# EAGLE board calculator3 (EAGLE 9.6.2)
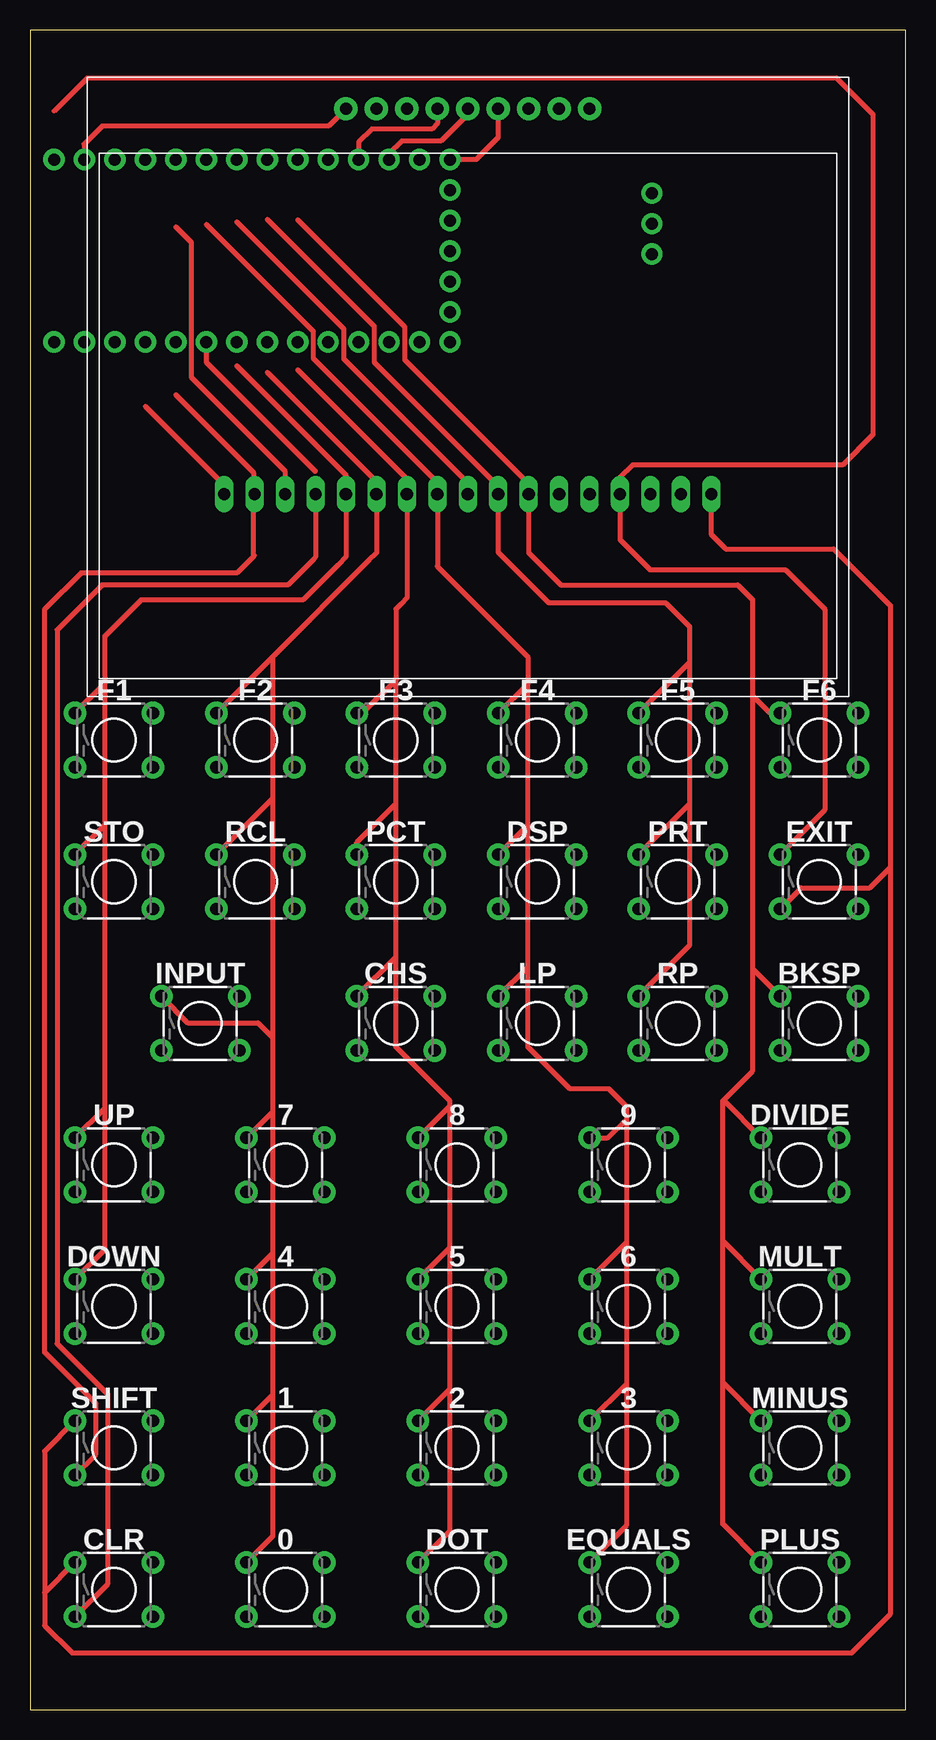
[diagram p0: board, top side]
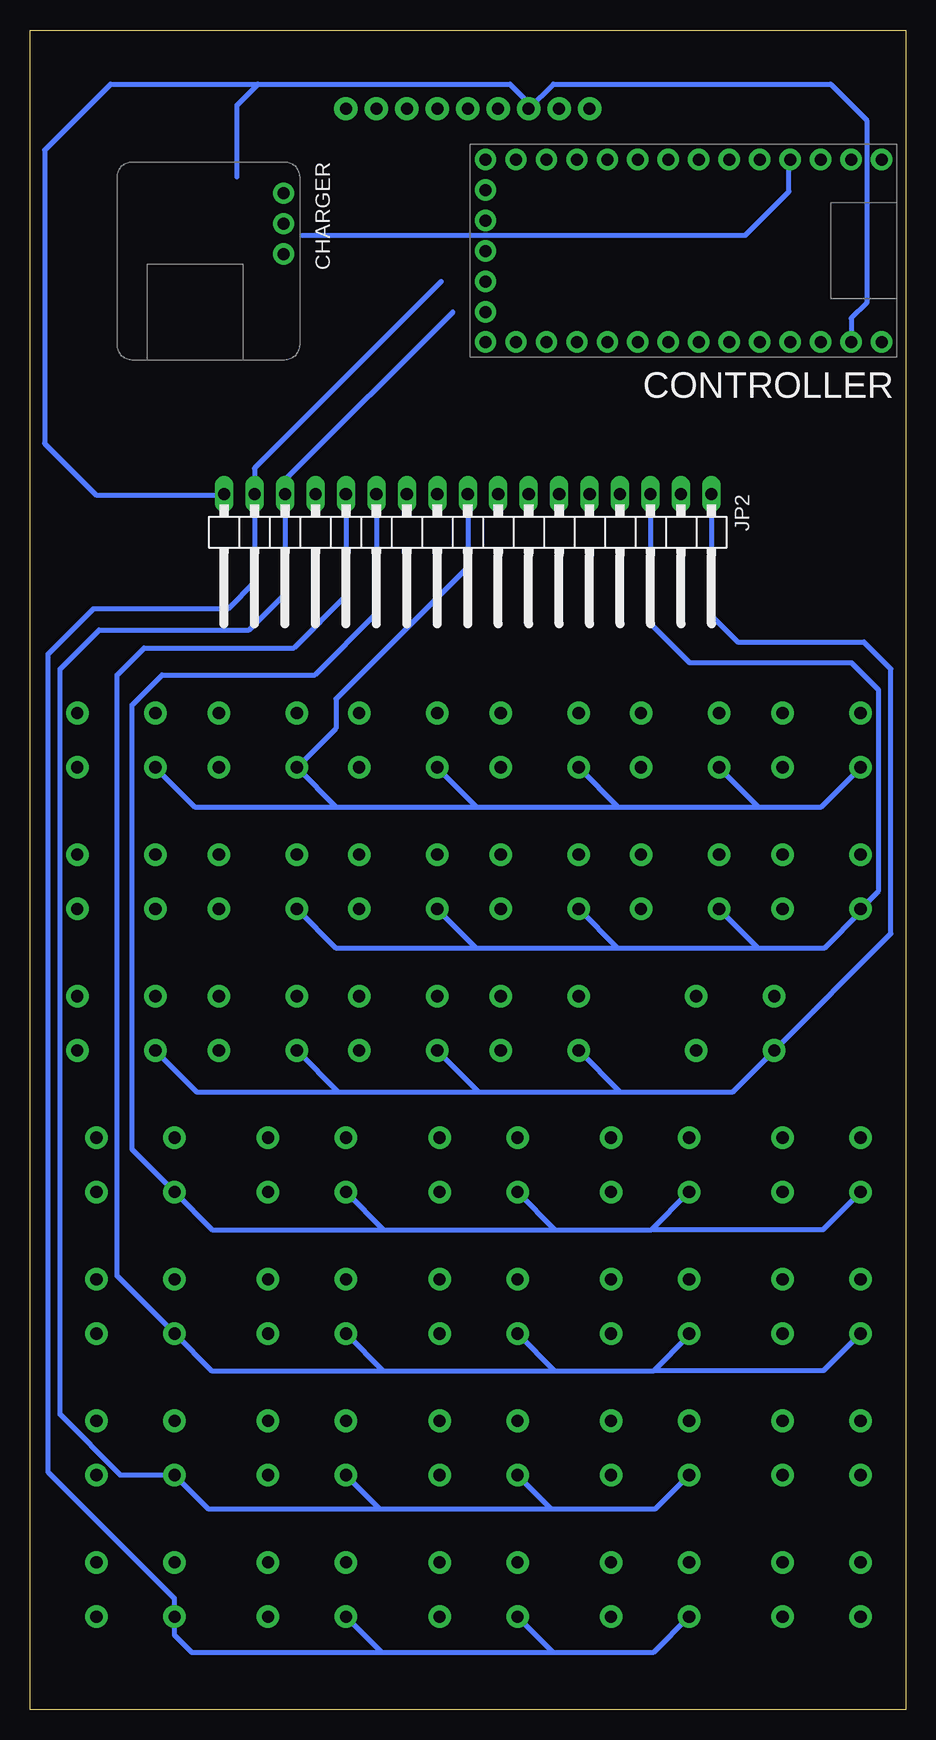
[diagram p1: board, bottom side, seen from below]

Size 73 x 140 mm. Coordinates in mm from the lower left corner, seen from the top.
Outline: 0,0 73,0 73,140 0,140 0,0
Copper layers (1*16): Top 0.035mm / dielectric 1.5mm / Bottom 0.035mm
Design rules "default": minimum track width 6mil, minimum drill 0.35mm, track to track 6mil, track to pad 6mil, pad to pad 6mil, via to via 6mil, smd to smd 6mil, copper to edge 40mil, drill to drill 6mil, minimum pad ring 10mil, minimum via ring 8mil, stop-mask expansion 4mil, vias tented up to drill 0mil, thermal gap 10mil

## Footprints (pad centres in the part's own frame; a part is rotated, then mirrored left to right if it is on the bottom)
BUTTON = drill 1.016 pad 1.88: 1 -3.251,2.261; 2 3.251,2.261; 3 -3.251,-2.261; 4 3.251,-2.261
LIPO_BACKPACK = drill 1 pad 1.778: 5V 7.68,13.9; BAT 2.6,13.9; GND 5.14,13.9
ITSYM4 = drill 1 pad 1.778: 0 34.27,16.5; 1 31.73,16.5; 2 34.27,1.3; 3 34.27,11.46; 3V3 3.79,1.3; 4 34.27,14; 5 24.11,16.5; 7 21.57,16.5; 9 19.03,16.5; 10 16.49,16.5; 11 13.95,16.5; 12 11.41,16.5; 13 8.87,16.5; A0 11.41,1.3; A1 13.95,1.3; A2 16.49,1.3; A3 19.03,1.3; A4 21.57,1.3; A5 24.11,1.3; AREF 6.33,1.3; BAT 1.25,16.5; DEBUG1 34.27,8.92; DEBUG2 34.27,6.38; EN 34.27,3.84; GND 3.79,16.5; MISO 31.73,1.3; MOSI 29.19,1.3; RST 1.25,1.3; SCK 26.65,1.3; SCL 26.65,16.5; SDA 29.19,16.5; USB 6.33,16.5; VHI 8.87,1.3
1X17/90 = drill 1.016 long: 1 -20.32,-3.81; 2 -17.78,-3.81; 3 -15.24,-3.81; 4 -12.7,-3.81; 5 -10.16,-3.81; 6 -7.62,-3.81; 7 -5.08,-3.81; 8 -2.54,-3.81; 9 0,-3.81; 10 2.54,-3.81; 11 5.08,-3.81; 12 7.62,-3.81; 13 10.16,-3.81; 14 12.7,-3.81; 15 15.24,-3.81; 16 17.78,-3.81; 17 20.32,-3.81
SHARPMEM = drill 1 pad 1.93: 3V3 -7.62,23.2; CLK -2.54,23.2; CS 2.54,23.2; DI 0,23.2; DISP 7.62,23.2; EIN 10.16,23.2; EMD 5.08,23.2; GND -5.08,23.2; VIN -10.16,23.2

## Placement (x,y rotation side)
0  BUTTON  [BUTTON]  21.3,10 0 top
1  BUTTON  [BUTTON]  21.3,21.8 0 top
2  BUTTON  [BUTTON]  35.6,21.8 0 top
3  BUTTON  [BUTTON]  49.9,21.8 0 top
4  BUTTON  [BUTTON]  21.3,33.6 0 top
5  BUTTON  [BUTTON]  35.6,33.6 0 top
6  BUTTON  [BUTTON]  49.9,33.6 0 top
7  BUTTON  [BUTTON]  21.3,45.4 0 top
8  BUTTON  [BUTTON]  35.6,45.4 0 top
9  BUTTON  [BUTTON]  49.9,45.4 0 top
BKSP  BUTTON  [BUTTON]  65.8,57.2 0 top
CHARGER  LIPO_BACKPACK  [LIPO_BACKPACK]  65.75,129 270 bottom
CHS  BUTTON  [BUTTON]  30.5,57.2 0 top
CLR  BUTTON  [BUTTON]  7,10 0 top
CONTROLLER  ITSYM4  [ITSYM4]  0.75,130.5 180 bottom
DIVIDE  BUTTON  [BUTTON]  64.2,45.4 0 top
DOT  BUTTON  [BUTTON]  35.6,10 0 top
DOWN  BUTTON  [BUTTON]  7,33.6 0 top
DSP  BUTTON  [BUTTON]  42.3,69 0 top
EQUALS  BUTTON  [BUTTON]  49.9,10 0 top
EXIT  BUTTON  [BUTTON]  65.8,69 0 top
F1  BUTTON  [BUTTON]  7,80.8 0 top
F2  BUTTON  [BUTTON]  18.8,80.8 0 top
F3  BUTTON  [BUTTON]  30.5,80.8 0 top
F4  BUTTON  [BUTTON]  42.3,80.8 0 top
F5  BUTTON  [BUTTON]  54,80.8 0 top
F6  BUTTON  [BUTTON]  65.8,80.8 0 top
INPUT  BUTTON  [BUTTON]  14.2,57.2 0 top
JP2  [1X17/90]  36.5,97.5 180 bottom
LP  BUTTON  [BUTTON]  42.3,57.2 0 top
MINUS  BUTTON  [BUTTON]  64.2,21.8 0 top
MULT  BUTTON  [BUTTON]  64.2,33.6 0 top
PCT  BUTTON  [BUTTON]  30.5,69 0 top
PLUS  BUTTON  [BUTTON]  64.2,10 0 top
PRT  BUTTON  [BUTTON]  54,69 0 top
RCL  BUTTON  [BUTTON]  18.8,69 0 top
RP  BUTTON  [BUTTON]  54,57.2 0 top
SHARPMEM  SHARPMEM  [SHARPMEM]  36.5,110.25 0 top
SHIFT  BUTTON  [BUTTON]  7,21.8 0 top
STO  BUTTON  [BUTTON]  7,69 0 top
UP  BUTTON  [BUTTON]  7,45.4 0 top

## Library data of the parts
0 1-9 BKSP CHARGER CHS CLR CONTROLLER DIVIDE DOT DOWN DSP EQUALS EXIT F1-F6 INPUT LP MINUS MULT PCT PLUS PRT RCL RP SHARPMEM SHIFT STO UP = aaa_pw
JP2 = pinhead

## Nets
CLR: CONTROLLER.11
COL1: DOWN.1 F1.1 JP2.5 STO.1 UP.1
COL2: 0.1 1.1 4.1 7.1 F2.1 INPUT.1 JP2.6 RCL.1
COL3: 2.1 5.1 8.1 CHS.1 DOT.1 F3.1 JP2.7 PCT.1
COL4: 3.1 6.1 9.1 DSP.1 EQUALS.1 F4.1 JP2.8 LP.1
COL5: F5.1 JP2.10 PRT.1 RP.1
COL6: BKSP.1 DIVIDE.1 F6.1 JP2.11 MINUS.1 MULT.1 PLUS.1
EXIT: EXIT.1 JP2.14
GND: CLR.1 CONTROLLER.GND EXIT.3 JP2.17 SHARPMEM.GND SHIFT.1
N$1: CONTROLLER.13
N$2: CONTROLLER.12
N$3: CONTROLLER.VHI
N$4: CONTROLLER.3V3 SHARPMEM.VIN
N$5: CONTROLLER.MOSI SHARPMEM.DI
N$6: CONTROLLER.SCK SHARPMEM.CLK
N$7: CONTROLLER.2 SHARPMEM.CS
N$8: CONTROLLER.A0
N$9: CLR.3 JP2.4
N$10: CONTROLLER.10
N$11: CONTROLLER.9
N$12: CONTROLLER.7
N$13: CONTROLLER.A1
N$14: CONTROLLER.A2
N$15: CONTROLLER.A3
N$16: CONTROLLER.A4
N$17: CONTROLLER.1
N$18: CONTROLLER.0
N$19: CONTROLLER.RST
N$20: CONTROLLER.4
N$21: CONTROLLER.3
ROW1: F1.3 F2.3 F3.3 F4.3 F5.3 F6.3 JP2.9
ROW2: DSP.3 JP2.3 PCT.3 PRT.3 RCL.3 STO.3
ROW3: BKSP.3 CHS.3 INPUT.3 JP2.1 LP.3 RP.3
ROW4: 7.3 8.3 9.3 DIVIDE.3 JP2.12 UP.3
ROW5: 4.3 5.3 6.3 DOWN.3 JP2.13 MULT.3
ROW6: 1.3 2.3 3.3 JP2.15 MINUS.3
ROW7: 0.3 DOT.3 EQUALS.3 JP2.16 PLUS.3
SHIFT: JP2.2 SHIFT.3

## Tracks (layer width: path | path; a pad name or v marks a point on that pad's centre or on a via)
CLR
  Top 0.406: CONTROLLER.11 14.7,112.3 23.8,103.2
COL1
  Top 0.406: UP.1 6.25,50.16 | 6.25,50.16 6.25,73.76 | 6.25,73.76 6.25,85.5 | DOWN.1 6.25,38.36 6.25,50.16 | STO.1 6.25,73.76 | 6.25,85.5 6.25,89.5 9.25,92.5 22.75,92.5 25.62,95.38 26.34,96.09 JP2.5 26.34,102.91 17.24,112.01 | F1.1 6.19,85.5 6.25,85.5
COL2
  Top 0.406: 0.1 20.25,14.46 20.25,26.26 | 20.25,26.26 20.25,38.06 | 20.25,38.06 20.25,49.86 | 20.25,49.86 20.25,56 | 20.25,56 20.25,75.96 | 20.25,75.96 20.25,87.76 | 1.1 20.25,26.26 | 4.1 20.25,38.06 | 7.1 20.25,49.86 | RCL.1 20.25,75.96 | F2.1 20.25,87.76 | 20.25,87.76 28.24,95.76 28.88,96.39 JP2.6 29,101.43 29,102.25 19.78,111.47 | INPUT.1 13.16,57.25 19,57.25 20.25,56
COL3
  Top 0.406: DOT.1 35,14.91 35,26.71 | 30.5,62.71 30.5,55.25 35,50.75 35,50.31 | 30.5,62.71 30.5,75.5 | 30.5,75.5 30.5,85.75 | 30.5,85.75 30.5,91.75 30.88,92.12 31.42,92.67 JP2.7 31.42,102.58 22.32,111.68 | 35,26.71 35,38.51 | 35,38.51 35,50.31 | 2.1 35,26.71 | 5.1 35,38.51 | 8.1 35,50.31 | CHS.1 30.5,62.71 | PCT.1 27.25,72.26 30.49,75.5 30.5,75.5 | F3.1 27.75,83.06 30.44,85.75 30.5,85.75
COL4
  Top 0.406: EQUALS.1 49.75,15.36 49.75,27.16 | 49.75,27.16 49.75,38.96 | 49.75,38.96 49.75,49.25 | 49.75,49.25 49.75,50.25 48.25,51.75 45,51.75 41.5,55.25 41.5,61.91 | 41.5,61.91 41.5,73.71 | 41.5,73.71 41.5,85.5 | 3.1 49.75,27.16 | 6.1 49.75,38.96 | 9.1 48.16,47.66 49.75,49.25 | LP.1 41.5,61.91 | DSP.1 41.5,73.71 | F4.1 41.5,85.5 | 41.5,85.5 41.5,87.75 34.5,94.75 33.96,95.29 JP2.8 34,101.35 34,102.25 23.61,112.64 23.61,114.89 14.7,123.8
COL5
  Top 0.406: RP.1 55,63.71 55,75.51 | 55,75.51 55,87.31 | 55,87.31 55,90.25 53,92.25 43.25,92.25 39.38,96.12 39.04,96.46 JP2.10 39.04,101.96 28.7,112.31 28.7,115.31 19.78,124.22 | PRT.1 55,75.51 | F5.1 55,87.31
COL6
  Top 0.406: PLUS.1 57.75,15.46 57.75,27.26 | 57.75,27.26 57.75,39.06 | 57.75,39.06 57.75,50.75 57.88,50.88 | 57.88,50.88 60.25,53.25 60.25,61.75 | 60.25,61.75 60.25,84.5 | 60.25,84.5 60.25,92.5 59,93.75 44.25,93.75 41.75,96.25 41.58,96.42 JP2.11 41.58,102.17 31.23,112.52 31.23,115.27 22.32,124.18 | MINUS.1 57.75,27.26 | MULT.1 57.75,39.06 | DIVIDE.1 57.88,50.73 57.88,50.88 | BKSP.1 60.25,61.75 | F6.1 61.69,83.06 60.25,84.5
EXIT
  Top 0.406: EXIT.1 66.25,74.96 66.25,91.75 63,95 51.72,95 49.2,97.52 JP2.14 49.2,102.7 50.25,103.75 67.75,103.75 70.28,106.28 70.28,132.97 67.25,136 4.75,136 2,133.25
GND
  Top 0.406: SHIFT.1 1.22,21.53 1.22,9.73 | 1.22,9.73 1.22,7 3.5,4.72 68.5,4.72 71.77,7.99 71.77,70.25 | CLR.1 1.22,9.73 | 71.77,70.25 71.77,91.98 | 71.77,91.98 71.77,92.02 | EXIT.3 64.31,68.5 70.02,68.5 71.77,70.25 | 71.77,91.98 67,96.75 58,96.75 56.82,97.93 JP2.17
  Bottom 0.406: 54,135.5 66.28,135.5 71.78,130 71.78,105.53 71.53,105.28 70.62,104.38 67.5,101.25 56.88,101.25 JP2.17 | 54,135.5 32.97,135.5 31.42,133.95 SHARPMEM.GND 29.37,135.5 6.25,135.5 3.25,132.5 3.25,117.25 4.54,115.96 CONTROLLER.GND | 55.75,127.76 55.75,133.75 54,135.5
N$3
  Bottom 0.406: CONTROLLER.VHI 9.71,129.29 9.71,126.54 13.38,122.88 50.3,122.88
N$4
  Top 0.406: SHARPMEM.VIN 24.89,132 6,132 4.5,130.5 4.5,129.24 CONTROLLER.3V3
N$5
  Top 0.406: SHARPMEM.DI 36.5,133 34.25,130.75 31,130.75 29.94,129.69 CONTROLLER.MOSI
N$6
  Top 0.406: SHARPMEM.CLK 33.96,132.21 33.5,131.75 28.5,131.75 27.4,130.65 CONTROLLER.SCK
N$7
  Top 0.406: SHARPMEM.CS 39.04,131.04 37.2,129.2 CONTROLLER.2
N$9
  Top 0.406: CLR.3 6.5,10.49 6.5,26.25 2.25,30.5 2.25,90 6,93.75 21.5,93.75 23.38,95.62 23.62,95.88 23.8,96.05 JP2.4
N$17
  Top 0.406: CONTROLLER.1 32.5,113.98
ROW1
  Top 0.406: 17.24,124.01 26.16,115.09 26.16,112.59 36.5,102.25 JP2.9
  Bottom 0.406: F6.3 59.26,75.25 47.46,75.25 | F1.3 7.04,75.25 12.26,75.25 | 47.46,75.25 35.76,75.25 | 35.76,75.25 23.96,75.25 | 23.96,75.25 12.26,75.25 | 47.46,75.25 F5.3 47.5,81.79 47.5,84.25 36.5,95.25 JP2.9 | F4.3 35.76,75.25 | F3.3 23.96,75.25 | F2.3 12.26,75.25
ROW2
  Top 0.406: 12.16,123.59 13.46,122.3 13.46,111.05 21.26,103.24 JP2.3
  Bottom 0.406: PRT.3 47.51,63.5 35.81,63.5 | 35.81,63.5 24.01,63.5 | 24.01,63.5 12.31,63.5 | 12.31,63.5 6.75,63.5 3.75,66.5 STO.3 2.25,68.24 2.25,85 4.5,87.25 18,87.25 21.12,90.38 21.26,90.51 JP2.3 | DSP.3 35.81,63.5 | PCT.3 24.01,63.5 | RCL.3 12.31,63.5
ROW3
  Top 0.406: JP2.1 16.18,102.07 9.62,108.63
  Bottom 0.406: BKSP.3 59.11,51.5 47.31,51.5 | 47.31,51.5 35.61,51.5 | 35.61,51.5 23.81,51.5 | 23.81,51.5 14.39,51.5 INPUT.3 1.22,64.67 1.22,86.75 3.47,89 14,89 15.88,90.88 16.18,91.18 JP2.1 | CHS.3 23.81,51.5 | LP.3 35.61,51.5 | RP.3 47.31,51.5
ROW4
  Top 0.406: 44.12,102.36 JP2.12
  Bottom 0.406: 21.19,40 7.3 | 43.51,40 57.81,40 DIVIDE.3 64.5,46.69 64.5,83.75 62,86.25 49.25,86.25 44.12,91.38 JP2.12 | 43.51,40 29.21,40 | 29.21,40 21.19,40 | 8.3 29.21,40 | 9.3 43.51,40 | UP.3 6.89,40 21.19,40
ROW5
  Top 0.406: 46.66,102.36 JP2.13
  Bottom 0.406: 43.56,28.25 57.86,28.25 MULT.3 65.75,36.14 65.75,86.25 63.5,88.5 51,88.5 46.66,92.84 JP2.13 | 43.56,28.25 29.26,28.25 | 29.26,28.25 21,28.25 | 21,28.25 18.05,31.2 4.3 | 5.3 29.26,28.25 | 6.3 43.56,28.25 | DOWN.3 6.84,28.25 21,28.25
ROW6
  Bottom 0.406: 1.3 20.84,16.75 29.56,16.75 | 43.86,16.75 58.16,16.75 MINUS.3 65.45,19.54 70.5,24.59 70.5,86.75 67.25,90 54.75,90 51.88,92.88 51.74,93.01 JP2.15 51.74,102.51 37.75,116.5 | 43.86,16.75 29.56,16.75 | 2.3 29.56,16.75 | 3.3 43.86,16.75
ROW7
  Bottom 0.406: 0.3 21.04,4.75 29.36,4.75 | 29.36,4.75 43.66,4.75 | 43.66,4.75 59.5,4.75 60.95,6.2 PLUS.3 60.95,9.24 71.5,19.79 71.5,88 67.75,91.75 56.5,91.75 54.28,93.97 JP2.16 54.28,103.47 38.71,119.04 | EQUALS.3 43.66,4.75 | DOT.3 29.36,4.75
SHIFT
  Top 0.406: SHIFT.3 5.5,21.29 5.5,25.5 1.22,29.78 1.22,91.72 4.25,94.75 17.25,94.75 18.62,96.12 | 18.72,96.22 18.62,96.12 | 18.62,96.12 18.62,101.22 | 18.62,101.22 JP2.2 | 18.62,101.22 18.62,103.12 12.16,109.59